# Altium PCB Telemetry_PCB.PcbDoc
Units mm, origin at the board's own origin, x right, y up, seen from the top; angles counter-clockwise.
Board outline 120.65 x 85.34 mm, 2 copper layers (Top Layer, Bottom Layer); 71 components, 63 nets, 283 pads, 68 vias.
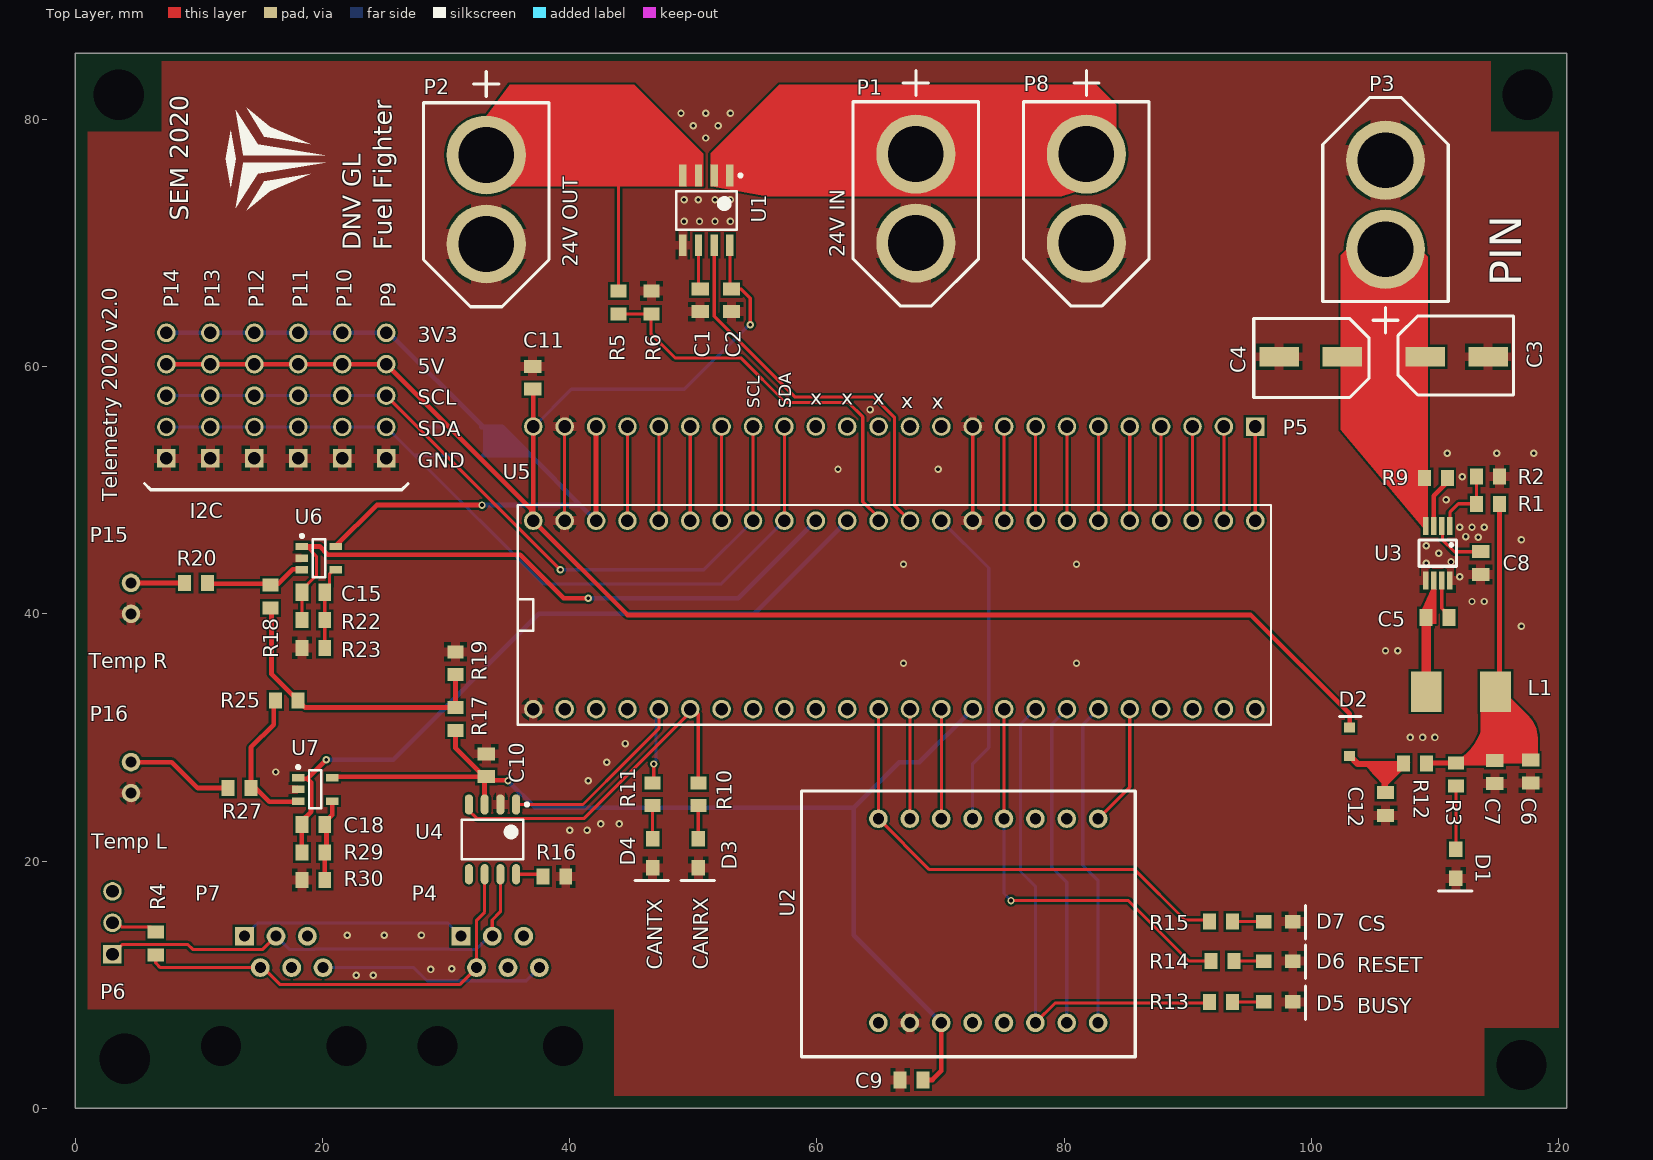
[diagram p0: Top Layer view]
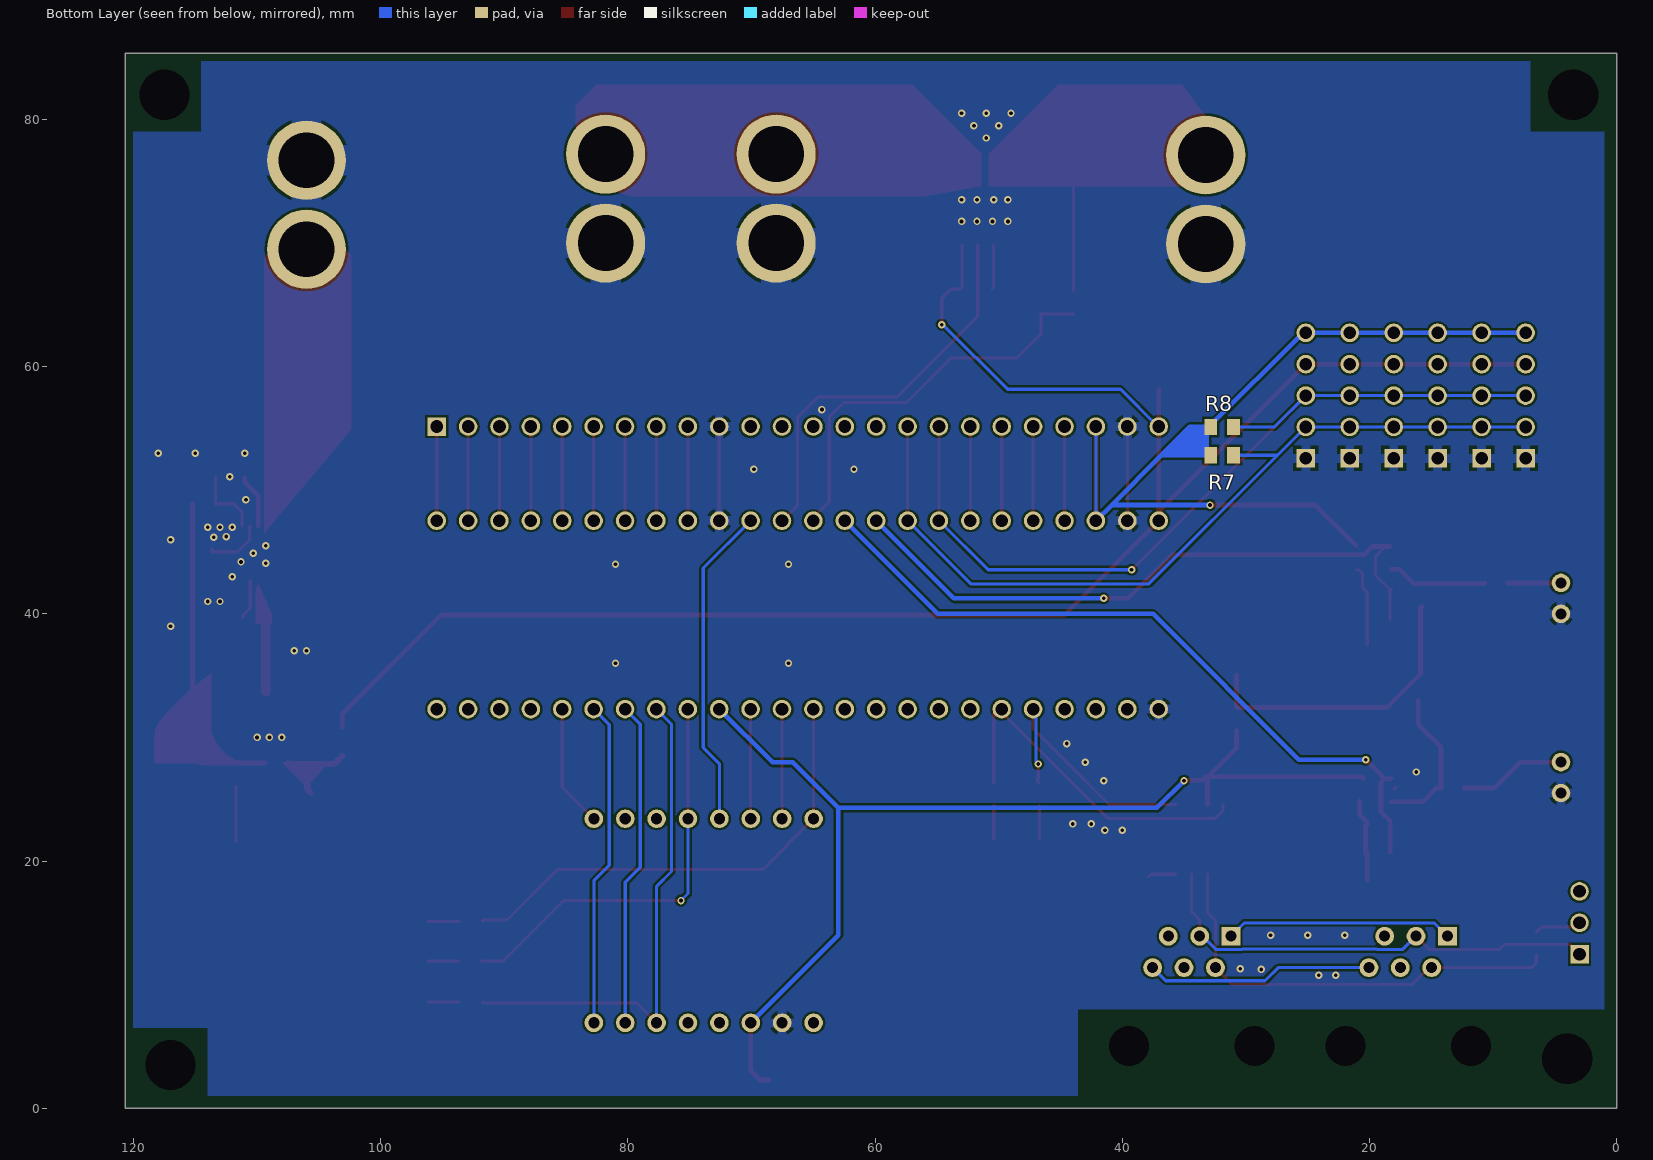
[diagram p1: Bottom Layer view, seen from below]
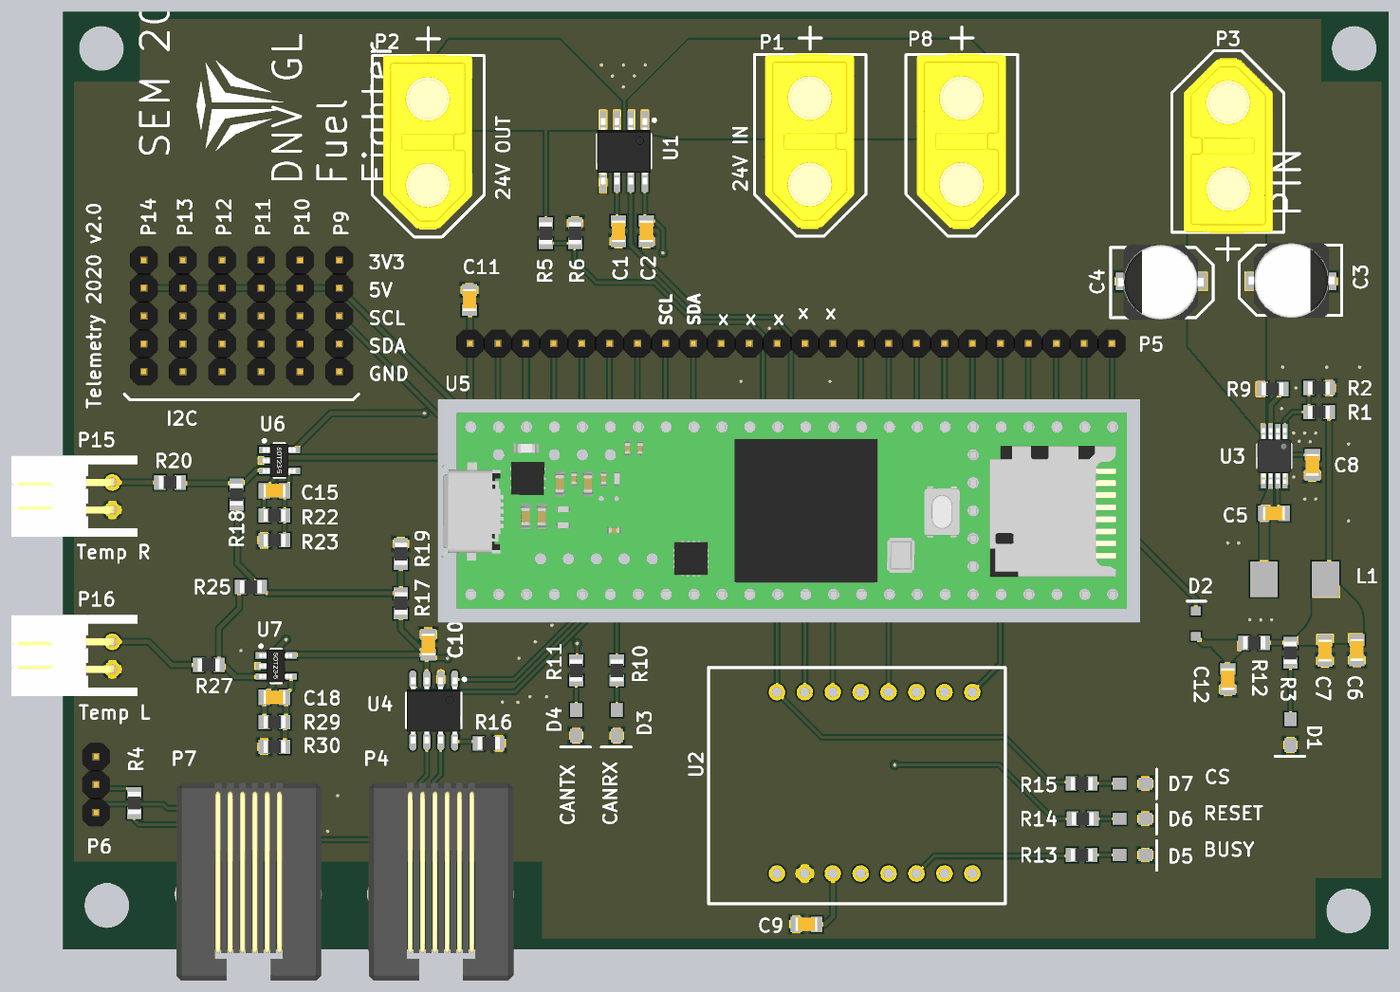
[diagram p2: 3D render of the assembled board from above, using the file's embedded part models]

## Layer stack, top to bottom
Top Solder: solder mask 0.0102, Solder Resist, Dk 3.5
Top Layer: signal copper 0.0356
Dielectric 1: dielectric 0.32, FR-4, Dk 4.8
Bottom Layer: signal copper 0.0356
Bottom Solder: solder mask 0.0102, Solder Resist, Dk 3.5

## Board outline
0,0 0,85.344 120.65,85.344 120.65,0

## Design rules (kind name [scope] priority, off if disabled: settings)
Clearance [All] p1: gap=0.178 ignorepadtopadclearanceinfootprint=FALSE
HoleSize [All] p1: absolutevalues=TRUE maxlimit=25.4 minlimit=0.025 maxpercent=80.000 minpercent=20.000
MinimumSolderMaskSliver [All] p1: minsoldermaskwidth=0.076
PlaneConnect [All] p1: planeconnectstyle=Relief reliefexpansion=0.508 reliefentries=4 reliefconductorwidth=0.508 reliefairgap=0.254
PolygonConnect PolygonConnect_XT-60 [HasFootprint('XT-60')] p1: thpad.connectstyle=Relief thpad.reliefconductorwidth=2.5 thpad.reliefentries=4 thpad.polygonreliefangle="90 Angle" thpad.airgapwidth=0.254 smdpad.connectstyle=Relief smdpad.reliefconductorwidth=0.254 smdpad.reliefentries=4 smdpad.polygonreliefangle="90 Angle" smdpad.airgapwidth=0.254 via.connectstyle=Relief via.reliefconductorwidth=0.254 via.reliefentries=4 via.polygonreliefangle="90 Angle" via.airgapwidth=0.254
PolygonConnect [All] p2: thpad.connectstyle=Relief thpad.reliefconductorwidth=0.762 thpad.reliefentries=4 thpad.polygonreliefangle="90 Angle" thpad.airgapwidth=0.254 smdpad.connectstyle=Relief smdpad.reliefconductorwidth=0.762 smdpad.reliefentries=4 smdpad.polygonreliefangle="90 Angle" smdpad.airgapwidth=0.254 via.connectstyle=Direct via.reliefconductorwidth=0.762 via.reliefentries=4 via.polygonreliefangle="90 Angle" via.airgapwidth=0.254
RoutingVias [All] p1: holewidth=0.3 width=0.6 viastyle="Through Hole" minholewidth=0.3 minwidth=0.6 maxholewidth=0.6 maxwidth=1.27 viatemplateguid#1={B7852F3B-45DD-46EC-AEA8-30D5E9FE662B} viatemplatename#1=v60h30
SilkToSolderMaskClearance [IsPad] p1: minsilkscreentomaskgap=0.178 clearancetoexposedcopper=TRUE
SolderMaskExpansion [All] p1: expansion=0.102 istentingtop=FALSE
Width [All] p1: maxlimit=7.62 minlimit=0.254 preferedwidth=0.254
26 further rules are at their usual default settings.

## Classes and differential pairs
component class Telemetry_temp_meas: C15 C18 P15 P16 R17 R18 R19 R20 R22 R23 R25 R27 R29 R30 U6 U7
component class Telemetry_canbus: C10 D3 D4 P4 P6 P7 R4 R10 R11 R16 U4
component class Telemetry_schematic: C1 C2 C3 C4 C5 C6 C7 C8 C9 C11 C12 D1 D2 D5 D6 D7 L1 P1 P2 P3 P5 P8 P9 P10 P11 P12 P13 P14 R1 R2 R3 R5 R6 R7 R8 R9 R12 R13 R14 R15 U1 U2 U3 U5

## Components (designator, comment, footprint, x,y, rotation, side; value= is the part's Value field where it differs from the comment)
C1 "SMD" C_SMD_0805_pcb 50.546,65.369 r270 top value=1n
C2 "SMD" C_SMD_0805_pcb 53.086,65.369 r270 top value=100n
C3 "C_EL_SMT_Ø6.3" C_EL_SMT_Ø6.3 109.2,60.8 r180 top value=10u
C4 "C_EL_SMT_Ø6.3" C_EL_SMT_Ø6.3 102.5,60.8 r0 top value=10u
C5 "SMD" C_SMD_0805_pcb 110.2,39.7 r180 top value=100n
C6 "SMD" C_SMD_0805_pcb 117.742,27.246 r270 top value=10u
C7 "SMD" C_SMD_0805_pcb 114.85,27.2 r270 top value=10u
C8 "SMD" C_SMD_0805_pcb 113.7,44.1 r270 top value=1u
C9 "SMD" C_SMD_0805_pcb 67.655,2.286 r180 top value=100n
C10 "SMD" C_SMD_0805_pcb 33.25,27.75 r90 top value=100n
C11 "SMD" C_SMD_0805_pcb 37,59.1 r270 top value=10u
C12 "SMD" C_SMD_0805_pcb 106,24.6 r270 top value=47u
C15 "SMD" C_SMD_0805_pcb 19.25,41.75 r0 top value=10n
C18 "SMD" C_SMD_0805_pcb 19.25,22.95 r0 top value=10n
D1 "LED" D_LED_0805 111.7,20.95 r270 top
D2 "D_CUS10S30" D_SC-76 103.1,28.5 r90 top
D3 "LED" D_LED_0805 50.4,21.8 r270 top
D4 "LED" D_LED_0805 46.7,21.8 r270 top
D5 "LED" D_LED_0805 96.15,8.6 r0 top
D6 "LED" D_LED_0805 96.15,11.9 r0 top
D7 "LED" D_LED_0805 96.15,15.1 r0 top
L1 "SMD" L_DR73_SMD 114.9,33.7 r180 top value=22u
P1 "XT-60" XT-60 68,70 r0 top
P2 "XT-60" XT-60 33.243,69.925 r0 top
P3 "XT-60" XT-60 106,76.7 r180 top
P4 "RJ11" RJ11_Connector 29.285,5.025 r0 top
P5 "1x24_M" PIN_HEADER_M_1x24 39.588,55.154 r0 top
P6 "CAN_Term" PIN_HEADER_M_1x3 3,17.54 r270 top
P7 "RJ11" RJ11_Connector 11.785,5.025 r0 top
P8 "XT-60" XT-60 81.8,70 r0 top
P9 "1x5_M" PIN_HEADER_M_1x5 25.146,62.738 r270 top
P10 "1x5_M" PIN_HEADER_M_1x5 21.59,62.738 r270 top
P11 "1x5_M" PIN_HEADER_M_1x5 18.034,62.738 r270 top
P12 "1x5_M" PIN_HEADER_M_1x5 14.478,62.738 r270 top
P13 "1x5_M" PIN_HEADER_M_1x5 10.922,62.738 r270 top
P14 "1x5_M" PIN_HEADER_M_1x5 7.366,62.738 r270 top
P15 "Temp R" JST_SE_2PIN 4.5,42.5 r270 top
P16 "Temp L" JST_SE_2PIN 4.5,28 r270 top
R1 "SMD" R_SMD_0805_pcb 114.3,48.9 r0 top value=52.3k
R2 "SMD" R_SMD_0805_pcb 114.3,51.1 r180 top value=10k
R3 "SMD" R_SMD_0805_pcb 111.7,27 r90 top value=470
R4 "SMD" R_SMD_0805_pcb 6.5,13.325 r90 top value=120
R5 "SMD" R_SMD_0805_pcb 43.942,65.187 r90 top value=2.4M
R6 "SMD" R_SMD_0805_pcb 46.609,65.187 r270 top value=300K
R7 "SMD" R_SMD_0805_pcb 31.913,52.832 r180 bottom value=4.7k
R8 "SMD" R_SMD_0805_pcb 31.913,55.118 r180 bottom value=4.7k
R9 "SMD" R_SMD_0805_pcb 110.075,51 r0 top value=1M
R10 "SMD" R_SMD_0805_pcb 50.4,25.4 r270 top value=470
R11 "SMD" R_SMD_0805_pcb 46.7,25.4 r270 top value=470
R12 "SMD" R_SMD_0805_pcb 108.4,27.9 r180 top value=0.001
R13 "SMD" R_SMD_0805_pcb 92.7,8.6 r180 top value=470
R14 "SMD" R_SMD_0805_pcb 92.8,11.9 r180 top value=470
R15 "SMD" R_SMD_0805_pcb 92.7,15.1 r180 top value=470
R16 "SMD" R_SMD_0805_pcb 38.75,18.75 r180 top value=22k
R17 "SMD" R_SMD_0805_pcb 30.75,31.5 r270 top value=10k
R18 "SMD" R_SMD_0805_pcb 15.8,41.4 r270 top value=100k
R19 "SMD" R_SMD_0805_pcb 30.75,36 r270 top value=10k
R20 "SMD" R_SMD_0805_pcb 9.75,42.5 r0 top value=1k
R22 "SMD" R_SMD_0805_pcb 19.25,39.5 r180 top value=100k
R23 "SMD" R_SMD_0805_pcb 19.25,37.25 r0 top value=1k
R25 "SMD" R_SMD_0805_pcb 17.1,33 r0 top value=100k
R27 "SMD" R_SMD_0805_pcb 13.275,25.9 r0 top value=1k
R29 "SMD" R_SMD_0805_pcb 19.25,20.7 r180 top value=100k
R30 "SMD" R_SMD_0805_pcb 19.25,18.45 r180 top value=1k
U1 "ACS712" ACS712_SMD 51.054,72.644 r270 top
U2 "LAMBDA80" LAMBDA62_SMT 82.753,6.909 r90 top
U3 "MCP16311" MCP16311/2_MSOP 109.25,47.1 r270 top
U4 "SN65GVD231d" SN65HVD231D_SMD 33.75,21.75 r270 top
U5 "teensy_3.6" teensy_3.6 35.143,31.659 r90 top
U6 "AD8628" SOT-23-5 19.7,44.5 r0 top
U7 "AD8628" SOT-23-5 19.4,25.8 r0 top

## Footprints (in the part's own frame and the unit in brackets; to place one, negate y for a bottom-side part, rotate by r counter-clockwise, add the part's x,y. Pads: shape width x height; smd on the part's side, far side on the other; paste and mask are expansions set on the pad)
ACS712_SMD [mm]
  rect 1.75x0.6 smd: 1(-2.825,1.905) 2(-2.825,0.635) 3(-2.825,-0.635) 4(-2.825,-1.905) 5(2.825,-1.905) 6(2.825,-0.635) 7(2.825,0.635) 8(2.825,1.905)
  silkscreen extent -2.95,-2.45 1.55,2.88, body extent -3,-2.45 3,2.45, height 1.91
C_EL_SMT_Ø6.3 [mm]
  rect 3.2x1.6 smd: 1(-5.1,0) 2(0,0)
  silkscreen extent -7.16,-3.3 2.17,3.1, body extent -6.5,-3.47 1.3,3.33, height 5.5
C_SMD_0805_pcb [mm] "Chip Capacitor, 2-Leads, Body 2,00x1,25mm, IPC Medium Density"
  rect 1.05x1.4 smd: 1(-0.925,0) 2(0.925,0)
  body extent -1,-0.63 1,0.62, height 1.35
D_LED_0805 [mm]
  rect 1.25x1.1 smd: 1(0,0) 2(2.35,0)
  silkscreen extent 3.38,-1.4 3.38,1.3, body extent -0.3,-0.63 2.65,0.63, height 1
D_SC-76 [mm]
  rect 0.8x0.9 smd: 1(0,0) 2(2.3,0)
  silkscreen extent 3.2,-0.9 3.2,0.8, body extent 0.2,-0.7 2.1,0.7, height 0.8
JST_SE_2PIN [mm]
  round 1.5 hole 0.9: 1(0,0) 2(2.5,0)
  body extent -2.45,-9.2 4.95,2.3, height 6.1
L_DR73_SMD [mm]
  rect 2.5x3.25 smd: 1(0,0) 2(5.6,0)
  body extent -1.02,-4.32 6.6,3.56, height 3.5
LAMBDA62_SMT [mm]
  round 1.5 hole 0.9: 1(0,17.78) 2(0,15.24) 3(0,12.7) 4(0,10.16) 5(0,7.62) 6(0,5.08) 7(0,2.54) 8(0,0) 9(16.51,0) 10(16.51,2.54) 11(16.51,5.08) 12(16.51,7.62) 13(16.51,10.16) 14(16.51,12.7) 15(16.51,15.24) 16(16.51,17.78)
  silkscreen extent -2.75,-3 18.75,24, body extent -2.79,-3.05 18.8,24.13, height 4
MCP16311/2_MSOP [mm]
  rect 1.45x0.45 smd paste+0 mask+0.05: 1(0,1.95)
  rect 1.45x0.45 smd mask+0.05: 2(0,1.3) 3(0,0.65) 4(0,0) 5(4.4,0) 6(4.4,0.65) 7(4.4,1.3) 8(4.4,1.95)
  silkscreen extent 1.12,-0.53 3.25,2.49, body extent -0.32,-0.58 4.72,2.53, height 1.05
PIN_HEADER_M_1x3 [mm]
  rect 1.5x1.5 hole 1.02: 1(5.08,0)
  round 1.5 hole 1.02: 2(2.54,0) 3(0,0)
  body extent -1.27,-1.27 6.35,1.27, height 8.34
PIN_HEADER_M_1x5 [mm]
  rect 1.5x1.5 hole 1.02: 1(10.16,0)
  round 1.5 hole 1.02: 2(7.62,0) 3(5.08,0) 4(2.54,0) 5(0,0)
  body extent -1.27,-1.27 11.43,1.27, height 8.34
PIN_HEADER_M_1x24 [mm]
  round 1.5 hole 1.02: 1(-2.54,0) 2(0,0) 3(2.54,0) 4(5.08,0) 5(7.62,0) 6(10.16,0) 7(12.7,0) 8(15.24,0) 9(17.78,0) 10(20.32,0) 11(22.86,0) 12(25.4,0) 13(27.94,0) 14(30.48,0) 15(33.02,0) 16(35.56,0) 17(38.1,0) 18(40.64,0) 19(43.18,0) 20(45.72,0) 21(48.26,0) 22(50.8,0) 23(53.34,0)
  rect 1.5x1.5 hole 1.02: 24(55.88,0)
  body extent -3.81,-1.27 57.15,1.27, height 8.34
R_SMD_0805_pcb [mm]
  rect 1.05x1.3 smd: 1(-0.925,0) 2(0.925,0)
  body extent -1,-0.6 1,0.6, height 0.65
RJ11_Connector [mil]
  rect 60x60 hole 35.04: 1(75,350)
  round 60 hole 35.04: 2(125,250) 3(175,350) 4(225,250) 5(275,350) 6(325,250)
  round 60 hole 127.95 unplated: ""(0,0) ""(400,0)
  body extent -58,-310 462,399, height 461
SN65HVD231D_SMD [mm]
  oval 1.65x0.65 smd: 1(-2.825,1.905) 2(-2.825,0.635) 3(-2.825,-0.635) 4(-2.825,-1.905) 5(2.825,-1.905) 6(2.825,-0.635) 7(2.825,0.635) 8(2.825,1.905)
  silkscreen extent -2.95,-2.5 1.6,2.91, body extent -3,-2.45 3,2.45, height 1.91
SOT-23-5 [mm] "0.95 pitch"
  rect 1x0.6 smd: 1(-1.375,0.95) 2(-1.375,0) 3(-1.375,-0.95) 4(1.375,-0.95) 5(1.375,0.95)
  silkscreen extent -1.5,-1.55 0.5,1.92, body extent -1.52,-1.5 1.48,1.5, height 1.45
teensy_3.6 [mm]
  round 1.5 hole 1.016: 0(0.635,-4.445) 1(0.635,-6.985) 2(0.635,-9.525) 3(0.635,-12.065) 4(0.635,-14.605) 5(0.635,-17.145) 6(0.635,-19.685) 7(0.635,-22.225) 8(0.635,-24.765) 9(0.635,-27.305) 10(0.635,-29.845) 11(0.635,-32.385) 12(0.635,-34.925) 13(15.875,-34.925) 14(15.875,-32.385) 15(15.875,-29.845) 16(15.875,-27.305) 17(15.875,-24.765) 18(15.875,-22.225) 19(15.875,-19.685) 20(15.875,-17.145) 21(15.875,-14.605) 22(15.875,-12.065) 23(15.875,-9.525) 24(0.635,-40.005) 25(0.635,-42.545) 26(0.635,-45.085) 27(0.635,-47.625) 28(0.635,-50.165) 29(0.635,-52.705) 30(0.635,-55.245) 31(0.635,-57.785) 32(0.635,-60.325) 33(15.875,-60.325) 34(15.875,-57.785) 35(15.875,-55.245) 36(15.875,-52.705) 37(15.875,-50.165) 38(15.875,-47.625) 39(15.875,-45.085) +3V3(0.635,-37.465) +3V3(15.875,-6.985) A21(15.875,-42.545) A22(15.875,-40.005) AGND(15.875,-4.445) GND(0.635,-1.905) GND(15.875,-37.465) VIN(15.875,-1.905)
  silkscreen extent -0.64,-61.59 17.15,-0.63, body extent -0.62,-61.66 17.16,0.7, height 7.49
XT-60 [mm]
  round 6.4 hole 4.5: 1(0,7.2) 2(0,0)
  silkscreen extent -5.08,-5.08 5.08,13.97, body extent -4.11,-4.41 4.02,11.52, height 15.5

## Part data
C1 C2 C5 C6 C7 C8 C9 C10 C11 C12 C15 C18: library part C_SMD_0805
D1 D3 D4 D5 D6 D7: library part D_LED_0805_SMD
D2: "Schottky diode, 30V reverse voltage. 220mV forward drop @1A", Supplier Part Number 1=CUS10S30H3FCT-ND, Supplier Link 1=https://www.digikey.no/product-detail/en/toshiba-semiconductor-and-storage/CUS10S30H3F/CUS10S30H3FCT-ND/5114377
L1: library part L_DR73_SMD
P4 P7: library part RJ11_Connector
P5: library part PIN_HEADER_M_1x24
P6: library part PIN_HEADER_M_1x3
P9 P10 P11 P12 P13 P14: library part PIN_HEADER_M_1x5
P15 P16: library part JST_SE_2PIN
R1 R2 R3 R4 R5 R6 R7 R8 R9 R10 R11 R12 R13 R14 R15 R16 R17 R18 R19 R20 R22 R23 R25 R27 R29 R30: library part R_SMD_0805
U1: library part ACS712_SMD
U2: library part LAMBDA_80_DIP
U3: library part MCP16311/2_SMD
U4: library part SN65HVD231D_SMD
U6 U7: library part AD8628WAUJZ-R7_SOT-23-5, Supplier Part Number 1=AD8628WAUJZ-R7CT-ND, Supplier Link 1=https://www.digikey.com/product-detail/en/analog-devices-inc/AD8628WAUJZ-R7/AD8628WAUJZ-R7CT-ND/2467896

## Free pads (board coordinates)
  round 1.524 hole 4.064 unplated: 2(3.5,82) 2(4,4) 2(117,3.5) 2(117.5,82)

## Via types
v1: diameter 0.6, hole 0.3, Top Layer to Bottom Layer, tented both sides, 68 vias

## Nets (pads, with @x,y where several pads share a name; then routed paths per layer and width w, separated by ;. In a path a pad name is that pad's centre, name@x,y a point inside that pad or via, vN(x,y) a via of type N, cw(c..) or ccw(c..) an arc to the next point about the centre after c; other vN are vias at no path point)
3V3: C9.1 C10.1 P5.3 P9.5 P10.5 P11.5 P12.5 P13.5 P14.5 R7.1 R8.1 R17.2 U2.3 U4.3 U5.+3V3 U6.5 U7.5 | length 171.4
  Top Layer w0.381: U7.5@20.45,26.65 20.625,26.825 C10.1@33.075,26.825 ; U6.5@21.075,45.5 24.375,48.8 v1(32.9,48.8) ; R17.2 30.75,29.15 C10.1@33.075,26.825 ; U4.3 33.095,24.595 C10.1@33.095,26.825 ; v1(35,26.5) 34.958,26.542 33.533,26.542 C10.1 C10.1@33.095,26.825 ; U5.+3V3@42.128,47.534 P5.3 ; C9.1 69.342,2.286 70.068,3.012 U2.3@70.068,6.894 ; U2.3@70.436,7.262 70.589,7.11 U2.3@70.589,6.894 ; C10.1@33.075,26.825 C10.1@33.095,26.825
  Bottom Layer w0.254: U5.+3V3@42.128,47.534 P5.3
  Bottom Layer w0.381: P14.5 P13.5 P12.5 P11.5 P10.5 P9.5 25.362,62.738 R8.1@32.982,55.118 ; R8.1 R8.1@32.982,55.118 ; v1(32.9,48.8) 32.902,48.802 40.86,48.802 ; R7.1@33.02,52.832 36.83,52.832 ; v1(35,26.5) 37.192,24.308 62.967,24.308 ; U5.+3V3@42.128,47.534 40.86,48.802 ; U2.3@70.068,6.894 U2.3 62.967,13.995 62.967,24.308 ; U5.+3V3@72.608,32.294 68.295,27.981 66.64,27.981 62.967,24.308 ; R8.1@32.982,55.118 34.544,55.118 36.83,52.832 ; 36.83,52.832 40.86,48.802
5V: C2.1 C11.2 D2.2 P5.1 P9.4 P10.4 P11.4 P12.4 P13.4 P14.4 U1.8 U5.VIN | length 148.5
  Top Layer w0.254: 36.83,48.514 36.83,47.752 U5.VIN ; P5.1 P5.1@37.267,55.373 ; U1.8 52.959,66.421 C2.1 53.848,66.294 54.6,65.542 v1(54.6,63.4)
  Top Layer w0.381: P14.4 P13.4 P12.4 P11.4 P10.4 P9.4 36.83,48.514 ; C11.2 37.048,58.127 P5.1 U5.VIN 44.679,39.903 95.097,39.903 103.1,31.9 D2.2
  Bottom Layer w0.254: P5.1 37.12,55.154 40.132,58.166 49.276,58.166 54.51,63.4 v1(54.6,63.4)
5V_CAN: P4.6 P7.6 | length 18.4
  Bottom Layer w0.254: P7.6 27.379,11.375 28.446,10.308 36.473,10.308 P4.6
24V_Board: C3.2 C4.2 P3.1 R9.1 U3.4 | length 0.1
  Top Layer w0.508: R9.1 R9.1@109.15,51.125
24V_In: P1.1 P8.1 U1.1 U1.2
24V_Out: P2.1 R5.2 U1.3 U1.4 | length 10.7
  Top Layer w0.254: 43.18,76.454 43.942,75.692 R5.2
GND: C1.2 C2.2 C3.1 C4.1 C6.2 C7.2 C8.2 C9.2 C10.2 C11.1 C12.2 D1.2 D3.2 D4.2 D5.2 D6.2 D7.2 P1.2 P2.2 P3.2 P5.2 P5.15 P8.2 P9.1 P10.1 P11.1 P12.1 P13.1 P14.1 P15.2 P16.2 R2.1 R6.1 R16.1 R19.1 R23.1 R30.2 U1.5 U2.2 U3.5 U3.8 U4.2 U5.AGND U5.GND U6.2 U7.2 | length 15.5
  Top Layer w0.254: U7.2@17.852,25.973 U7.2 ; U5.AGND P5.2 ; U5.GND@72.608,47.534 P5.15
  other v1: 22.725,10.75 24.1,10.75 28.75,11.225 30.45,11.275 22,14 25,14 28,14 40,22.5 41.4,22.5 42.5,23 44,23 41.5,26.5 16.2,27.2 43,28 44.5,29.5 108,30 109,30 110,30 67,36 81,36 106,37 107,37 117,39 113,41 114,41 112,43 67,44 81,44 109.3,44.1 111.3,44.2 110.3,44.9 109.3,45.5 117,46 113.5,46.2 112.5,46.25 112,47 113,47 114,47 110.9,49.225 112.2,51.1 61.7,51.7 69.8,51.7 111,53 115,53 118,53 64.3,56.525 49.25,71.75 50.5,71.75 51.75,71.75 53,71.75 49.25,73.5 50.4,73.5 51.75,73.5 53,73.5 51,78.5 50,79.5 52,79.5 49,80.5 51,80.5 53,80.5
NetC1_1: C1.1 U1.6 | length 3.6
  Top Layer w0.254: U1.6 50.419,66.421 C1.1
NetC5_1: C5.1 U3.7 | length 3.2
  Top Layer w0.254: U3.7 110.55,40.45 111.125,39.875 C5.1
NetC5_2: C5.2 L1.2 U3.6 | length 6
  Top Layer w0.254: C5.2 C5.2@109.3,39.675
  Top Layer w0.8: L1.2 C5.2@109.3,39.675
NetC6_1: C6.1 C7.1 L1.1 R1.2 R3.2 R12.1 | length 21.6
  Top Layer w0.381: R12.1 109.35,27.925 R3.2 114.367,27.925 ccw(c114.367,28.608) C7.1 ; L1.1@115.09,33.515 114.9,33.325 L1.1 115.225,34.025 R1.2
NetC8_1: C8.1 U3.2 | length 4.8
  Top Layer w0.254: U3.2 110.606,47.044 110.606,45.994 111.595,45.005 111.805,45.005 111.825,45.025 C8.1 ; C8.1@113.58,45.145 C8.1@113.7,45.265
NetC12_1: C12.1 D2.1 R12.2 | length 7.8
  Top Layer w0.508: D2.1 103.75,27.85 107.425,27.85 R12.2 107.475,27.775 105.946,26.246 105.946,25.796 C12.1@105.675,25.525
NetC15_1: C15.1 R22.2 U5.17 U6.1 | length 52.7
  Top Layer w0.254: R22.2 C15.1 ; C15.1@18.325,41.925 19.5,43.1 19.5,44.646 U6.1@18.696,45.45
  Top Layer w0.381: C15.1 C15.1@18.325,41.925 ; U6.1 18.525,45.45 18.696,45.45 19.754,45.45 20.434,44.77 35.98,44.77 39.5,41.25 v1(41.5,41.25)
  Bottom Layer w0.381: v1(41.5,41.25) 53.624,41.25 U5.17
NetC15_2: C15.2 R22.1 R23.2 U6.4 | length 6.5
  Top Layer w0.254: R23.2@20.175,37.5 R22.1 C15.2 20.573,42.148 20.573,43.248 20.875,43.55 U6.4
NetC18_1: C18.1 R29.2 U5.16 U7.1 | length 59.2
  Top Layer w0.381: U7.1@18.259,26.659 18.25,26.65 18.771,26.65 ; R29.2 C18.1@18.325,22.942 ; R29.2@18.325,20.75 R29.2@18.325,21 ; C18.1@18.325,23.242 19.068,23.985 19.068,26.353 18.771,26.65 ; v1(20.3,28.2) 18.771,26.671 18.771,26.65
  Bottom Layer w0.381: v1(20.3,28.2) 25.7,28.2 37.5,40 54.914,40 U5.16
NetC18_2: C18.2 R29.1 R30.1 U7.4 | length 6.7
  Top Layer w0.381: R30.1 R29.1@20.175,20.45 ; R29.1@20.175,20.75 R29.1@20.312,20.887 ; C18.2 20.175,23.125 20.775,23.725 U7.4 ; R29.1@20.312,20.588 R29.1@20.312,20.887 ; C18.2@20.312,22.95 R29.1@20.312,20.887
NetD1_1: D1.1 R3.1 | length 4.5
  Top Layer w0.254: D1.1@111.7,21.55 R3.1
NetD3_1: D3.1 R10.2 | length 2.7
  Top Layer w0.254: D3.1 R10.2
NetD4_1: D4.1 R11.2 | length 2.7
  Top Layer w0.254: D4.1 R11.2
NetD5_1: D5.1 R13.1 | length 2.5
  Top Layer w0.254: R13.1 D5.1
NetD6_1: D6.1 R14.1 | length 2.4
  Top Layer w0.254: R14.1 D6.1
NetD7_1: D7.1 R15.1 | length 2.5
  Top Layer w0.254: R15.1 D7.1
NetP4_1: P4.1 P7.1 | length 18.4
  Bottom Layer w0.254: P7.1 14.757,14.982 30.123,14.982 P4.1
NetP4_2: P4.2 P7.2 R4.1 U4.6 | length 35.7
  Top Layer w0.254: R4.1 6.5,11.75 6.875,11.375 P7.2 15.199,11.375 16.574,10 31.085,10 P4.2 32.46,15.21 33.115,15.865 U4.6
NetP4_3: P4.3 P6.1 P7.3 U4.7 | length 38
  Top Layer w0.254: P6.1 3.77,13.23 9.105,13.23 9.487,12.848 15.163,12.848 16.17,13.855 16.17,13.975 P7.3 ; P4.3 33.73,15.23 34.385,15.885 U4.7
  Bottom Layer w0.254: P7.3 17.297,12.848 19.394,12.848 19.419,12.874 30.276,12.874 30.302,12.848 32.425,12.848 33.491,13.915 P4.3
NetP5_4: P5.4 U5.23 | length 7.6
  Top Layer w0.254: U5.23 P5.4
NetP5_5: P5.5 U5.22 | length 7.6
  Top Layer w0.254: U5.22 P5.5
NetP5_6: P5.6 U5.21 | length 7.6
  Top Layer w0.254: U5.21 P5.6
NetP5_7: P5.7 U5.20 | length 7.6
  Top Layer w0.254: U5.20 P5.7
NetP5_8: P5.8 P9.3 P10.3 P11.3 P12.3 P13.3 P14.3 R8.2 U5.19 | length 69.5
  Top Layer w0.254: P9.3 v1(39.243,43.561) ; U5.19 P5.8
  Bottom Layer w0.254: P14.3 P13.3 P12.3 P11.3 P10.3 P9.3 27.686,55.118 R8.2 ; v1(39.243,43.561) 50.855,43.561 U5.19
NetP5_9: P5.9 P9.2 P10.2 P11.2 P12.2 P13.2 P14.2 R7.2 U5.18 | length 68.6
  Top Layer w0.254: U5.18 P5.9
  Bottom Layer w0.254: P14.2 P13.2 P12.2 P11.2 P10.2 P9.2 27.432,52.832 ; R7.2 27.432,52.832 ; U5.18 52.252,42.418 37.846,42.418 27.432,52.832
NetP5_16: P5.16 U5.A22 | length 7.6
  Top Layer w0.254: U5.A22 P5.16
NetP5_17: P5.17 U5.A21 | length 7.6
  Top Layer w0.254: U5.A21 P5.17
NetP5_18: P5.18 U5.39 | length 7.6
  Top Layer w0.254: U5.39 P5.18
NetP5_19: P5.19 U5.38 | length 7.6
  Top Layer w0.254: U5.38 P5.19
NetP5_20: P5.20 U5.37 | length 7.6
  Top Layer w0.254: U5.37 P5.20
NetP5_21: P5.21 U5.36 | length 7.6
  Top Layer w0.254: U5.36 P5.21
NetP5_22: P5.22 U5.35 | length 7.6
  Top Layer w0.254: U5.35 P5.22
NetP5_23: P5.23 U5.34 | length 7.6
  Top Layer w0.254: U5.34 P5.23
NetP5_24: P5.24 U5.33 | length 7.6
  Top Layer w0.254: U5.33 P5.24
NetP6_2: P6.2 R4.2 | length 3.8
  Top Layer w0.254: P6.2 3.418,15 3.77,14.648 6.102,14.648 R4.2
NetP15_1: P15.1 R20.1 | length 4.3
  Top Layer w0.381: P15.1 R20.1
NetP16_1: P16.1 R27.1 | length 8.7
  Top Layer w0.381: P16.1 7.8,28 9.9,25.9 R27.1
NetR1_1: R1.1 R2.2 U3.1 | length 5.8
  Top Layer w0.254: U3.1 111.206,47.106 111.206,48.206 111.9,48.9 R1.1 R2.2
NetR5_1: R5.1 R6.2 U5.15 | length 33.3
  Top Layer w0.254: R5.1 46.548,64.262 46.558,64.251 46.558,62.662 48.514,60.706 53.848,60.706 57.454,57.1 62.534,57.1 63.703,55.931 63.703,49.073 64.988,47.788 U5.15 ; R6.2@46.482,64.389 R6.2
NetR9_2: R9.2 U3.3 | length 4.4
  Top Layer w0.381: U3.3 109.9,49.55 111,50.65 R9.2
NetR10_1: R10.1 U4.4 U5.4 | length 28.9
  Top Layer w0.254: U4.4 31.845,24.075 32.475,23.445 41.17,23.445 49.748,32.023 U5.4 49.8,32.242 50.058,32.242 50.4,31.9 R10.1
NetR11_1: R11.1 U4.1 U5.3 | length 21.8
  Top Layer w0.254: U4.1 41.075,24.575 44.763,28.262 47.208,30.708 47.208,31.786 U5.3@46.954,32.04 ; R11.1 46.925,26.55 46.8,26.675 v1(46.8,27.85)
  Bottom Layer w0.254: v1(46.8,27.85) 46.991,28.041 46.991,32.077 U5.3
NetR13_2: R13.2 U2.6 U5.25 | length 41.2
  Top Layer w0.254: U2.6 79.264,8.5 91.675,8.5 R13.2
  Bottom Layer w0.254: U2.6 77.673,17.95 76.468,19.155 76.468,31.074 U5.25
NetR14_2: R14.2 U2.12 U5.24 | length 33.9
  Top Layer w0.254: U2.12@75.148,23.404 U5.24 ; v1(75.7,16.8) 85.2,16.8 90.1,11.9 R14.2
  Bottom Layer w0.254: U2.12 75.133,17.367 v1(75.7,16.8)
NetR15_2: R15.2 U2.16 U5.10 | length 39.2
  Top Layer w0.254: U5.10 64.988,23.404 69.092,19.3 85.7,19.3 89.775,15.225 91.775,15.225 R15.2
NetR16_2: R16.2 U4.8 | length 2.2
  Top Layer w0.254: U4.8 37.65,18.925 R16.2
NetR18_1: R18.1 R20.2 U6.3 | length 8.1
  Top Layer w0.381: R20.2 10.75,42.425 15.75,42.425 16.425,42.425 17.6,43.6 U6.3@18.25,43.6
NetR25_1: R25.1 R27.2 U7.3 | length 12.4
  Top Layer w0.381: R25.1@16.075,33 16.038,32.963 16.038,31.037 14.2,29.2 R27.2 14.6,25.9 15.7,24.8 U7.3@18.25,24.8
NetU1_7: U1.7 U5.14 | length 32.6
  Top Layer w0.254: U1.7 51.689,64.077 58.234,57.532 64.642,57.532 66.269,55.905 66.269,48.793 U5.14
NetU2_7: U2.7 U5.26 | length 26.4
  Bottom Layer w0.254: U2.7 80.213,18.287 79,19.5 79,31.066 U5.26
NetU2_8: U2.8 U5.27 | length 26.4
  Bottom Layer w0.254: U2.8 82.753,18.404 81.5,19.657 81.5,31.026 U5.27
NetU2_9: U2.9 U5.28 | length 9.9
  Top Layer w0.254: U2.9 85.308,25.974 U5.28
NetU2_13: U2.13 U5.13 | length 26.2
  Bottom Layer w0.254: U5.13 73.9,43.702 73.9,29.172 72.593,27.865 U2.13
NetU2_14: U2.14 U5.12 | length 8.9
  Top Layer w0.254: U2.14@70.068,23.404 U5.12
NetU2_15: U2.15 U5.11 | length 8.9
  Top Layer w0.254: U2.15@67.528,23.404 U5.11
V_REF: R17.1 R18.2 R19.2 R25.2 | length 24.2
  Top Layer w0.381: R18.2@15.75,40.575 15.875,40.575 15.875,35.125 18.575,32.425 R17.1 R19.2
pads on no net: P4. P4.4 P4.5 P5.10 P5.11 P5.12 P5.13 P5.14 P6.3 P7. P7.4 P7.5 U2.1 U2.4 U2.5 U2.10 U2.11 U4.5 U5.0 U5.1 U5.2 U5.5 U5.6 U5.7 U5.8 U5.9 U5.29 U5.30 U5.31 U5.32
copper on no net: | length 0.4
  Bottom Layer w0.254: 17.5,11.375 17.612,11.487 17.612,11.263

## Polygon pours and split planes (outlines as drawn)
no net on Top Overlay (solid): 12.975,76.8 12.567,74.499 12.158,76.8 12.567,79.101
no net on Top Overlay (solid): 19.062,77.988 15.276,78.582 13.866,80.957 15.722,79.398
no net on Top Overlay (solid): 19.062,75.612 15.276,75.018 13.866,72.643 15.722,74.202
no net on Top Overlay (solid): 20.213,76.503 13.569,76.503 12.975,72.865 14.757,75.612
no net on Top Overlay (solid): 20.176,77.097 13.569,77.097 12.975,80.735 14.757,77.988
no net on Top Overlay (solid): 40.386,2.125
GND on Bottom Layer "Bottom Layer-GND" (solid, remove dead copper, pour order 32): 43.6,1 43.6,8 1,8 1,79 7,79 7,84.7 114.5,84.7 114.5,79 120,79 120,6.5 114,6.5 114,1
GND on Top Layer "Top Layer-GND" (solid, remove dead copper, pour order 30): 43.6,1 43.6,8 1,8 1,79 7,79 7,84.7 114.5,84.7 114.5,79 120,79 120,6.5 114,6.5 114,1

## Other copper
Top Layer:
  region net NetC6_1: 113.7,35.2 113.7,27.9 118.3,27.9 118.3,29.948 ccw(c115.76,29.948) 117.556,31.744 115.3,34
  region net NetC6_1: 111.166,27.925 113.9,27.925 113.9,31.623 cw(c109.919,31.707)
  region net 24V_Board: 109.4,46.5 109.4,68.9 108.4,69.9 103.3,69.9 102.4,69 102.4,54.877
  region net NetC5_2: 108.8,39.2 108.8,40 109.7,42 109.9,42.4 110.1,42 110.1,41.5 110.1,40.1 110.1,39.2
  region net NetC12_1: 106,26 105,27 104.2,28 108,28
  region net 24V_In: 51.4,74.6 51.4,77.25 56.95,82.8 82.6,82.8 84.2,81.2 84.2,76.02 83.6,75 79.806,73.8 55.95,73.8
  region: 124.7,32.3
  region: 118.6,32.6
  region net 24V_Out: 33.274,80.264 33.02,80.01 33.528,80.01
  region net GND: 110.49,66.548
  region net 24V_Out: 50.8,74.6 34.409,74.6 35.306,75.946 35.814,76.708 35.814,76.962 33.147,80.137 35.126,82.804 45.212,82.804 50.8,77.216
Bottom Layer:
  region net 3V3: 36.5,53 32.982,53 32.982,55.118 34.544,55.118

## Silkscreen, mask and mechanical layers (free items; w line width, h text height)
Top Overlay:
  lines w0.254: 5.588,50.546 6.096,50.038 26.416,50.038 26.924,50.546
  text "SEM 2020" at 9.6,71.8 h2.54 r90
  text "DNV GL / Fuel Fighter" at 26.1,69.4 h2.54 r90
  text "24V IN" at 62.23,68.834 h1.2 r90
  text "24V OUT" at 40.64,68.072 h1.2 r90
  text "PIN" at 117,66.5 h2.54 r90
  text "3V3" at 27.686,61.976 h1.2
  text "5V" at 27.686,59.436 h1.2
  text "SCL" at 27.686,56.896 h1.2
  text "x" at 59.476,56.896 h1.2
  text "x" at 61.976,56.896 h1.2
  text "x" at 64.516,56.896 h1.2
  text "SCL" at 55.372,56.642 h1.02 r90
  text "SDA" at 57.912,56.642 h1.02 r90
  text "x" at 66.802,56.642 h1.2
  text "x" at 69.3,56.6 h1.2
  text "SDA" at 27.686,54.356 h1.2
  text "GND" at 27.686,51.816 h1.2
  text "Telemetry 2020 v2.0" at 3.4,49.1 h1.2 r90
  text "I2C" at 9.25,47.75 h1.2
  text "CS" at 103.8,14.3 h1.2
  text "CANTX" at 47.5,11.2 h1.2 r90
  text "CANRX" at 51.2,11.2 h1.2 r90
  text "RESET" at 103.7,11 h1.2
  text "BUSY" at 103.7,7.7 h1.2
Mechanical 1:
  lines w0.254: 0.225,0.175 120.45,0.175 120.45,85.175 0.225,85.175 0.225,0.175